# EAGLE board PLACA_AUDIOS_v6_LOBO_GRANDE (EAGLE 7.6.0)
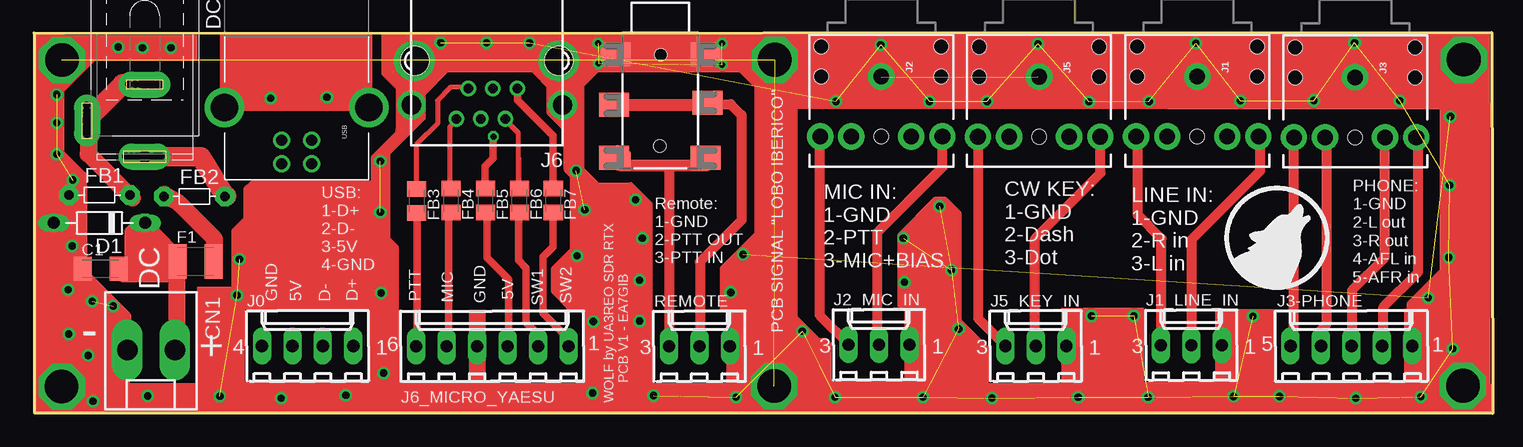
[diagram p0: board, top side]
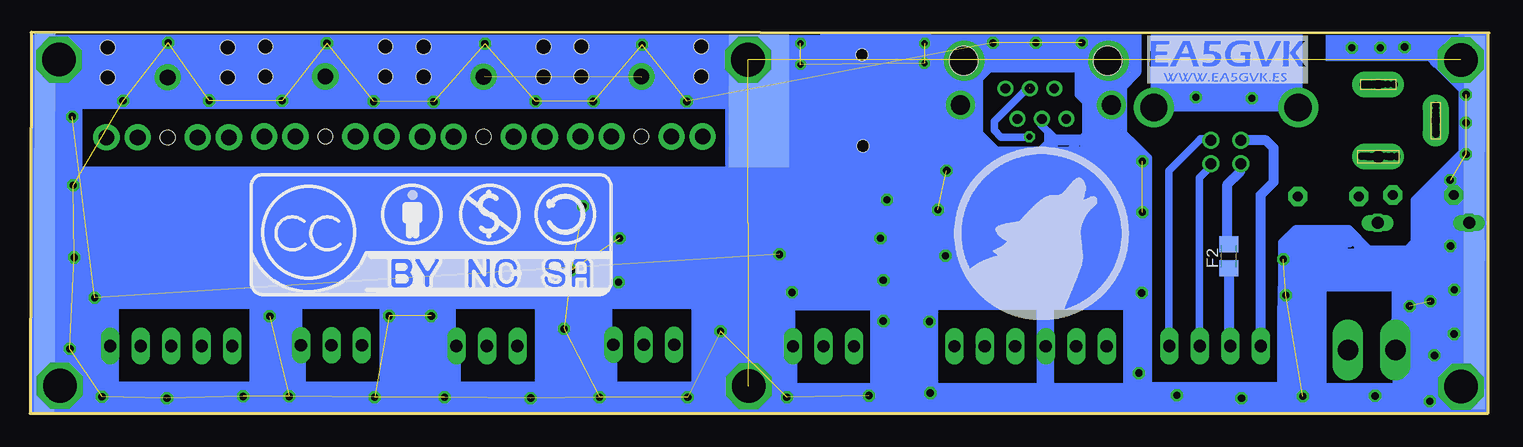
[diagram p1: board, bottom side, seen from below]

Size 121.6 x 31.75 mm. Coordinates in mm from the lower left corner, seen from the top.
Outline: 0,31.69 121.53,31.75 121.6,0 0.06,0.01 0.08,31.62
Copper layers (1*16): Top 0.035mm / dielectric 1.5mm / Bottom 0.035mm
Design rules "default": minimum track width 10mil, minimum drill 24mil, track to track 8mil, track to pad 8mil, pad to pad 8mil, via to via 8mil, smd to smd 8mil, copper to edge 40mil, drill to drill 8mil, minimum pad ring 10mil, minimum via ring 8mil, stop-mask expansion 4mil, vias tented up to drill 0mil, thermal gap 10mil

## Footprints (pad centres in the part's own frame; a part is rotated, then mirrored left to right if it is on the bottom)
C1206K = smd 1.5 x 2: 1 -1.5,0; 2 1.5,0
KK-156-2 = drill 1.7 pad 2.184 long: 1 -1.98,0; 2 1.98,0
D-7.5 = drill 0.813 long: A 3.81,0; C -3.81,0
SPC4078 = drill 0.8 pad 2.184 long: 1 -3,0; 2 0,-4.8 | drill 1 pad 2.184 long: 3 3,0
TP17SQ = smd 1.7 x 1.7: TP 0,0
1503_02 = smd 2.5 x 1.5: 1 -3.75,-10.75; 3 3.75,-10.75 | smd 2.5 x 2: 2 -3.75,-1.9; 2@1 3.95,-5.91; 2@2 3.75,-1.9; 2@3 -3.87,-6.11; 2@4 -3.87,-10.51; 2@5 3.75,-10.51 | hole 1: 0.04,-1.92; -0.04,-9.54
C1210K = smd 1.5 x 2.9: 1 -1.5,0; 2 1.5,0
C0805K = smd 1.3 x 1.6: 1 -1,0; 2 1,0
R-5 = drill 0.813 pad 1.6 octagon: 1 -2.54,0; 2 2.54,0
6410-04 = drill 1.016 long: 1 3.81,0; 2 1.27,0; 3 -1.27,0; 4 -3.81,0
AUDIO-JACK-KIT = drill 1.3 pad 2.184: RING 5,5.1; RSH 5,2.5; SLEEVE 0,0; TIP 5,-5.1; TSH 5,-2.5 | hole 1.2: 0,5; -2.5,5; -2.5,-5; 0,-5; 5,0
6410-03 = drill 1.016 long: 1 2.54,0; 2 0,0; 3 -2.54,0
6410-05 = drill 1.016 long: 1 5.08,0; 2 2.54,0; 3 0,0; 4 -2.54,0; 5 -5.08,0
YH-55-10 = drill 0.8 pad 1.3: 1 -2.54,2.3; 2 -1.54,4.84; 3 -0.5,2.3; 4 0.5,4.84; 5 1.54,2.3; 6 2.54,4.84 | drill 1.6 pad 2.184: S1 -6.3,3.68; S2 6.3,3.68 | hole 2.36: -6,0; 6,0
6410-06 = drill 1.016 long: 1 6.35,0; 2 3.81,0; 3 1.27,0; 4 -1.27,0; 5 -3.81,0; 6 -6.35,0
USB-B-PTH = drill 0.914: D+ 0,1.25; D- 1.981,1.25; GND 0,-1.25; VBUS 1.981,-1.25 | drill 2.286: P$1 -2.718,-6.02; P$2 -2.718,6.02

## Placement (x,y rotation side)
C1  [C1206K]  5.57,12.06 0 top
CN1  [KK-156-2]  9.78,5.27 180 top
D1  [D-7.5]  5.48,15.87 180 top
DC  [SPC4078]  9.23,24.4 270 top
E$1  [TP17SQ]  1.19,30.6 0 bottom
E$2  [TP17SQ]  1.19,29.1 0 bottom
E$3  [1503_02]  52.23,31.82 0 top
E$4  [TP17SQ]  1.2,27.45 0 bottom
E$5  [TP17SQ]  1.2,25.82 0 bottom
E$6  [TP17SQ]  1.22,24.15 0 bottom
E$7  [TP17SQ]  1.22,22.65 0 bottom
E$8  [TP17SQ]  1.23,21 0 bottom
E$9  [TP17SQ]  1.23,19.36 0 bottom
E$10  [TP17SQ]  1.23,17.68 0 bottom
E$11  [TP17SQ]  1.23,16.18 0 bottom
E$12  [TP17SQ]  1.23,14.58 0 bottom
E$13  [TP17SQ]  1.23,12.91 0 bottom
E$14  [TP17SQ]  1.22,13.56 0 bottom
E$15  [TP17SQ]  1.23,11.58 0 bottom
E$16  [TP17SQ]  1.23,10.41 0 bottom
E$17  [TP17SQ]  1.23,8.77 0 bottom
E$18  [TP17SQ]  1.25,7.11 0 bottom
E$19  [TP17SQ]  1.25,5.61 0 bottom
E$20  [TP17SQ]  1.25,3.96 0 bottom
E$21  [TP17SQ]  1.26,2.32 0 bottom
E$22  [TP17SQ]  1.22,1.18 0 bottom
E$23  [CC-NC-BY]  103.19,9.9 0 bottom
E$24  [EA5GVK1]  28.47,27.52 0 bottom
E$26  [TP17SQ]  120.36,30.82 0 bottom
E$27  [TP17SQ]  120.36,29.32 0 bottom
E$28  [TP17SQ]  120.38,27.68 0 bottom
E$29  [TP17SQ]  120.38,26.04 0 bottom
E$30  [TP17SQ]  120.39,24.37 0 bottom
E$31  [TP17SQ]  120.39,22.87 0 bottom
E$32  [TP17SQ]  120.41,21.22 0 bottom
E$33  [TP17SQ]  120.41,19.59 0 bottom
E$34  [TP17SQ]  120.41,17.91 0 bottom
E$35  [TP17SQ]  120.41,16.41 0 bottom
E$36  [TP17SQ]  120.41,14.8 0 bottom
E$37  [TP17SQ]  120.41,13.14 0 bottom
E$38  [TP17SQ]  120.39,13.79 0 bottom
E$39  [TP17SQ]  120.41,11.8 0 bottom
E$40  [TP17SQ]  120.41,10.64 0 bottom
E$41  [TP17SQ]  120.41,9 0 bottom
E$42  [TP17SQ]  120.42,7.33 0 bottom
E$43  [TP17SQ]  120.42,5.83 0 bottom
E$44  [TP17SQ]  120.42,4.18 0 bottom
E$45  [TP17SQ]  120.44,2.55 0 bottom
E$46  [TP17SQ]  120.44,0.87 0 bottom
E$62  [TP17SQ]  59.22,30.69 0 bottom
E$63  [TP17SQ]  60.87,30.69 0 bottom
E$64  [TP17SQ]  62.52,30.69 0 bottom
E$65  [TP17SQ]  59.22,29.19 0 bottom
E$66  [TP17SQ]  60.9,29.19 0 bottom
E$67  [TP17SQ]  62.54,29.19 0 bottom
E$68  [TP17SQ]  59.22,27.93 0 bottom
E$69  [TP17SQ]  60.87,27.93 0 bottom
E$70  [TP17SQ]  62.52,27.93 0 bottom
E$71  [TP17SQ]  59.22,26.43 0 bottom
E$72  [TP17SQ]  60.9,26.43 0 bottom
E$73  [TP17SQ]  62.54,26.43 0 bottom
E$74  [TP17SQ]  59.22,25.61 0 bottom
E$75  [TP17SQ]  60.87,25.61 0 bottom
E$76  [TP17SQ]  62.52,25.61 0 bottom
E$77  [TP17SQ]  59.22,24.11 0 bottom
E$78  [TP17SQ]  60.9,24.11 0 bottom
E$79  [TP17SQ]  62.54,24.11 0 bottom
E$80  [TP17SQ]  59.22,22.84 0 bottom
E$81  [TP17SQ]  60.87,22.84 0 bottom
E$82  [TP17SQ]  62.52,22.84 0 bottom
E$83  [TP17SQ]  59.22,21.34 0 bottom
E$84  [TP17SQ]  60.9,21.34 0 bottom
E$85  [TP17SQ]  62.54,21.34 0 bottom
F1  [C1210K]  13.48,12.66 0 top
F2  [C0805K]  21.69,13.09 90 bottom
FB1  [R-5]  5.48,18.19 0 top
FB2  [R-5]  13.4,18.07 0 top
FB3  [C0805K]  31.92,17.7 270 top
FB4  [C0805K]  34.79,17.73 270 top
FB5  [C0805K]  37.66,17.73 270 top
FB6  [C0805K]  40.49,17.73 270 top
FB7  [C0805K]  43.3,17.73 270 top
J0  [6410-04]  22.83,5.61 0 top
J1  [AUDIO-JACK-KIT]  96.99,28.07 270 top
J1_LINE_IN  [6410-03]  96.5,5.68 0 top
J2  [AUDIO-JACK-KIT]  70.65,28.07 270 top
J2_MIC_IN  [6410-03]  70.46,5.71 0 top
J3  [AUDIO-JACK-KIT]  110.14,28 270 top
J3-PHONE  [6410-05]  109.84,5.61 0 top
J5  [AUDIO-JACK-KIT]  83.81,28.05 270 top
J5_KEY_IN  [6410-03]  83.53,5.61 0 top
J6  [YH-55-10]  37.77,29.39 180 top
J6_MICRO_YAESU  [6410-06]  38.22,5.59 0 top
REMOTE  [6410-03]  55.49,5.59 0 top
USB  [USB-B-PTH]  21.91,22.77 270 top

## Library data of the parts
C1 = ref-packages-longpad
CN1 J0 J1_LINE_IN J2_MIC_IN J3-PHONE J5_KEY_IN J6_MICRO_YAESU REMOTE = con-molex
D1 F1 = ea7gib2
DC = con-jack
E$1 E$2 E$4-E$22 E$26-E$46 E$62-E$85 = testpad
E$3 = con-lumberg
E$23 = cc-by-nc-sa
E$24 = LOGOS_BLAS1
F2 FB3-FB7 = rcl
FB1 FB2 = discrete
J1-J3 J5 = SparkFun-Connectors
J6 = con-wenzhou-yihua
USB = 11111

## Nets
S$20: J0.4

## Tracks (layer width: path | path; a pad name or v marks a point on that pad's centre or on a via)
S$1  (via drill 2.8 pad 3.81)
  other vias: 119.2,29.48
S$2
  Top 1.422: 8.96,21.25 9.03,21.18
S$3
  Top 1.676: 16.05,18.12 15.9,18.18 13.95,21.34 9.32,21.37
S$4  (via drill 2.8 pad 3.81)
  other vias: 2.33,2.22
S$5
  Bottom 1.422: 3.32,16.9 1.38,16.9 1.35,16.87
S$6
  Top 1.422: 4.53,24.57 4.53,21.63 8.22,17.94
  Top 1.676: 9.57,27.43 7.4,27.43 4.53,24.57
S$7
  Top 1.422: 8.3,15.04 9.81,15.04 11.93,12.93 11.93,5.36
S$8
  Top 1.422: 15.06,12.4 15.06,14.55 12.12,17.49 10.98,18.12 10.89,18.24
S$9
  Top 1.422: 3.15,16.87 3.15,11.29 7.48,6.96 7.5,6.96
S$10
  Top 1.422: 8.25,15.09 8.25,12.37 7.5,11.62 11.28,11.62 11.33,11.67 11.33,12.19 9.62,13.9 9.62,12.68 9.44,12.5 9.44,13.89 9.21,14.11 9.21,12.52 9.63,12.11 10.14,12.11 10.17,12.14
S$11
  Bottom 0.61: 0.96,21.97 2.01,21.97 6.21,17.77 6.21,14.31 6.83,13.69 10.01,13.69 11.7,15.39 16.11,15.39 17.25,14.25 17.25,9.39 16.86,9 16.86,9.97 16.35,10.48 4.65,10.48 3.87,11.26 3.87,18.19 4.56,18.89 4.56,18.64 5.75,17.46 5.75,11.39 5.78,11.36
S$12
  Top 0.406: 36.38,27.16 34.73,27.16 33.65,26.08 33.65,24.12 31.89,22.36 31.89,19.07
S$13
  Top 0.406: 31.91,18.99 31.77,18.86
S$14
  Top 0.61: 31.94,16.57 31.94,5.04
S$15
  Top 0.61: 43.27,18.73 43.27,23.14 40.32,26.1 40.32,27.03 40.35,27.06
S$16
  Top 0.406: 40.41,18.97 40.41,23.36 39.26,24.51
S$17
  Bottom 0.813: 21.63,5.64 21.63,11.89
S$18
  Bottom 0.61: 24.13,5.88 24.13,19.65 23.18,20.61
S$19
  Top 0.406: 40.41,21.3 40.41,19.02
S$20
  Bottom 0.813: J0.4 19.02,18.21 17.94,19.29 17.94,22.11 18.59,22.75 20.7,22.75 20.74,22.71
S$21
  Bottom 1.016: 110.32,27.82 108.34,25.84 64.11,25.84 62.88,27.07
S$22
  Bottom 1.016: 97.05,28.11 97.05,26.11
S$23  (1 unrouted)
  Bottom 1.016: 83.72,28.04 83.72,26.25 83.78,26.19 | 70.65,27.99 70.65,26.21
S$24
  Bottom 1.016: 47.7,29.82 48.91,29.82 50.96,27.78 53.84,27.78 55.82,29.76 55.82,29.77 55.94,29.89
S$25  (via drill 2.8 pad 3.81)  (2 unrouted)
  other vias: 2.34,29.45 61.77,29.46 61.71,2.27
S$26
  Bottom 0.61: 26.67,5.32 26.67,20.23 24.03,22.87
S$27
  Top 1.422: 7.86,5.93 5.73,5.93 2.36,2.55
S$28
  Top 0.406: 37.38,19.26 37.41,19.23
S$29  (via drill 0.5 pad 0.25)  (3 unrouted)
  other vias: 57.38,30.84 47.04,30.84 47.07,29.18 57.38,29.07
S$30
  Top 0.406: 36.42,27.14 35.85,27.14
S$31
  Top 1.016: 7.55,0.72 7.55,8.18 3.89,11.83 3.89,19.8 1.8,21.89 1.8,21.07 3.51,19.36 3.51,17.62 3.05,17.16 3.05,18.89 2.82,19.11 2.82,17.94 2.43,17.55 2.43,18.19 2.55,18.32 2.55,15.6
S$32
  Top 0.61: 43.29,16.87 43.29,13.9 42.45,13.07 42.45,8.32 44.32,6.45
S$33
  Top 0.406: 34.73,18.81 34.73,23.94 35.35,24.57
S$34
  Top 0.61: 34.73,16.66 34.57,16.66 34.57,5.49
S$35
  Top 0.61: 37.7,16.44 37.74,16.48
S$36
  Top 0.61: 40.43,16.32 40.47,16.36
S$37  (1 unrouted)
  Top 1.422: 6.24,30.52 5.27,30.52 1.62,26.88 1.62,28.11 2.97,29.46
  Bottom 1.422: 2.97,29.46 4.23,29.46 5.03,30.25 4.98,30.25 1.73,27
S$38
  Bottom 1.016: 70.57,28.04 70.77,28.04
S$39
  Top 0.61: 40.4,16.86 40.4,12.76 41.05,12.11 41.05,7.56 41.94,6.68
S$40
  Top 0.61: 39.57,5.4 39.57,11.18 37.79,12.96 37.79,16.39 37.74,16.44 37.79,16.44
S$41  (via drill 2.8 pad 3.81)
  other vias: 119.13,2.3
S$42
  Top 0.61: 44.46,11.1 44.67,10.89
S$43
  Top 0.61: 46.05,9.46 44.79,9.46 43.83,10.43 43.83,11.88 44.27,12.32 44.77,12.32 44.82,12.27 44.82,12.66 45.05,12.89 | 44.54,11.25 45.05,11.76 45.05,12.89 | 45.05,12.96 45.05,12.89 | 45.05,12.96 44.84,12.75 44.84,10.12 43.8,11.16 | 45.05,12.96 45.05,13.74 44.99,13.8 44.99,20.32 44.96,20.36
S$44
  Bottom 1.016: 56.88,29.86 60.07,29.86 64.06,25.87
S$45
  Top 0.813: 105.01,23 105.01,6.91 104.61,6.51
S$46
  Bottom 1.016: 1.1,24.15 1.1,22.59 3.95,19.74 2.79,19.74 2.49,20.04 2.49,13.25 7.62,8.11
S$47
  Bottom 1.016: 3.29,11.39 3.29,11.29 7.46,7.12
S$48
  Bottom 0.813: 7.59,5.1 7.59,5.4 7.64,5.44 7.64,0.55 6.29,0.55 6.29,1 6.98,1 6.98,7.12 7.5,7.12 7.5,5.7 7.58,5.7 7.58,6.4 7.68,6.4 | 7.68,6.4 7.68,4.84 | 7.68,6.4 7.68,6.51 7.74,6.51 7.74,5.1 7.71,5.1 7.71,7.86 7.66,7.86
  Bottom 1.016: 4.98,8.41 4.98,7.71 7.59,5.1
S$49
  Top 0.813: 56.82,25.72 56.7,25.61
S$50
  Top 0.61: 49.01,25.59 56.41,25.59 56.52,25.48
S$51
  Top 0.61: 48.41,21.51 48.6,21.51 49.63,20.47 55.91,20.47 55.94,20.5
S$52  (via drill 2.35)
  other vias: 31.71,29.39
S$53  (via drill 2.35)
  other vias: 43.76,29.39
S$54
  Top 0.61: 120.36,9.01 114.73,9.01 114.73,9.11 117.85,12.22 117.85,11.76 115.44,9.34 117.24,9.34 117.41,9.51 117.41,10.65 117.36,10.69 117.36,10.44 116.61,9.69 116.44,9.69 116.35,9.6 117.34,9.6 117.39,9.55
S$55
  Top 0.813: 52.98,5.44 52.98,15.27 52.98,17.44 52.98,20.23 52.96,20.25
S$56
  Top 0.813: 65.5,23.04 65.5,8.19 68.03,5.67
S$57
  Top 0.813: 70.35,5.67 70.35,15.11 75.77,20.52 75.77,23.13 75.87,23.23
S$58
  Bottom 0.813: 73.11,5.71 73.11,1.62 72.78,1.29
S$59
  Bottom 0.813: 86.13,5.71 86.13,1.8 85.84,1.51
S$60
  Bottom 0.813: 99.06,5.76 99.06,1.32 98.92,1.18
S$61
  Bottom 0.813: 115.12,5.57 115.12,1.44 115.23,1.33
S$62
  Top 0.813: 78.71,23 78.71,7.93 81.19,5.44
S$63
  Top 0.813: 83.46,5.64 83.46,14.55 88.92,20.01 88.92,23.11 88.84,23.19
S$64
  Top 0.813: 94,5.5 94,14.57 92.03,16.54 92.03,22.92 92,22.95
S$65
  Top 0.813: 96.53,5.57 96.53,14.49 102.24,20.21 102.24,23.11 102.12,23.23
S$66
  Top 0.813: 107.75,23.02 107.75,7.39 107.14,6.79
S$67
  Top 0.813: 112.57,22.83 112.57,12.94 109.88,10.25 109.88,5.93
S$68
  Top 0.813: 112.5,5.32 112.5,8.86 115.39,11.76 115.39,22.9 115.35,22.95
S$69
  Bottom 0.813: 58.1,5.57 58.1,1.42
S$70
  Top 0.813: 48.72,25.77 58.1,25.77 59.01,24.86 59.01,16.11 55.53,12.63 55.53,5.67 55.68,5.52
S$71
  Top 0.61: 89.66,2.14 92.1,2.14 92.26,2.31 102.69,2.31 102.94,2.05
S$72
  Top 0.61: 77.49,2.68 79.28,2.68 79.29,2.67 79.29,5.41 77.03,7.68 77.03,5.01 77.3,4.74 78.68,4.74 78.87,4.93 78.87,5.28 77.22,6.93 77.22,5.54 77.46,5.29 78.27,5.29 78.41,5.16 78.12,5.16 77.69,5.59 77.69,5.96 77.58,6.06
S$73
  Top 0.61: 76.8,5.71 76.8,5.16 77.5,4.46 77.21,4.46 77.03,4.27 77.03,16.62 75.9,17.75 75.19,17.75 72.27,14.82 72.27,9.07 74.59,9.07 74.62,9.04 74.62,1.96 75.05,1.54 75.05,1.92 74.58,2.39 64.05,2.39 63.63,2.8
S$74
  Top 0.61: 72.66,14.25 72.66,14.43 75.36,17.13 76.05,17.13 76.14,17.04 76.14,16.74 76.69,16.18 76.69,14.77 76.72,14.75 73.52,14.75 73.5,14.73 73.63,14.73 75.51,16.61 76.03,16.61 76.14,16.5 76.14,15.57 76.49,15.22 74.82,15.22 74.75,15.3 74.75,15.43 75.5,16.18 74.94,16.18 73.92,15.16 75.13,15.16 75.88,15.91 75.66,15.91 75.56,16.02 75.88,16.02 75.94,16.08
S$75
  Top 0.61: 63.95,2.08 63.95,3.39 66.21,5.65 65.69,5.65 62.93,8.41 62.93,7.8 64.31,6.42 63.88,6.42 63.69,6.22 63.69,6.5 63.65,6.54 63.65,6.34 63.84,6.15 63.99,6.15 64.09,6.04 64.69,6.04 64.75,5.98 64.86,5.98 64.88,5.97 65.97,5.97 66.22,5.71 66.22,2.19 66.05,2.01
S$76
  Top 0.61: 62.01,18.39 62.01,16.56 57.51,12.06 58.34,12.06 60.27,14 60.27,13.51 58.98,12.22 60.36,12.22 60.6,12.46
S$77
  Bottom 0.61: 44.61,30.22 44.61,21.39 44.37,21.15 44.37,21.72 44.34,21.75 44.34,30.01 44.67,30.34
S$78
  Top 1.422: 4.53,24.5 4.53,23.05
S$79
  Top 0.61: 22.57,17.41 26.51,17.41 30.1,13.82 30.1,6.84 30,6.73 30,8.26 29.61,8.65 29.61,13.39 29.8,13.59 29.8,13.62
S$80
  Bottom 0.61: 45.03,30.11 45.03,21.46 45.15,21.34
S$81
  Top 0.61: 45.44,14.43 45.44,12.97 44.74,12.29 44.74,12.55 45.57,13.38
S$82
  Bottom 0.61: 45.21,17.75 45.21,13.79 43.41,11.98 43.41,10.15 44.63,8.94 47.46,8.94 47.51,8.98 45.2,8.98 44.05,10.12 44.05,11.93 43.94,12.04 44.12,12.04 44.97,12.9 44.97,10.64 44.41,10.08 44.41,10.27 43.86,10.83 43.86,11.47 43.79,11.55 43.79,10.47 43.76,10.44 44.48,10.44 45.06,9.86 45.06,9.78 45.09,9.75 45.09,9.94 44.38,10.65 44.38,11.62 44.41,11.65 44.41,11.88 44.52,11.98 44.54,11.98 44.61,12.06 44.61,12.04 44.82,11.83 44.82,11.47 44.94,11.36 44.94,11.13 45.05,11.02
S$83  (via drill 0.6)  (1 unrouted)
  other vias: 28.89,16.75 28.89,21.01
S$84  (via drill 0.6)
  other vias: 50.18,17.79
S$85  (via drill 0.6)
  other vias: 28.95,10.04
S$86  (via drill 0.6)
  other vias: 29.18,3.36
S$87  (via drill 0.6)  (2 unrouted)
  other vias: 15.51,1.42 16.94,9.84 17.15,12.86
S$88  (via drill 0.6)
  other vias: 20.63,1.26
S$89  (via drill 0.6)
  other vias: 26.01,1.5
S$90  (via drill 0.6)  (1 unrouted)
  other vias: 45.93,16.98 45.21,20.23
S$91  (via drill 0.6)
  other vias: 45.3,13.12
S$92  (via drill 0.6)
  other vias: 50.49,11.1
S$93  (via drill 0.6)
  other vias: 46.65,7.65
S$94  (via drill 0.6)
  other vias: 50.49,7.69
S$95  (via drill 0.6)
  other vias: 46.57,1.69
S$96  (via drill 0.6)  (36 unrouted)
  other vias: 51.68,1.48 58.53,1.33 66.8,1.33 74.13,1.33 79.88,1.27 87.06,1.33 92.89,1.33 100.02,1.41 103.84,1.41 115.62,1.39 110.2,1.26 117.94,12.99 118.02,19.02 118.29,5.39 64.06,6.86 75.51,17.25 72.48,14.59 76.5,11.94 77.1,7.04 88.17,8.11 91.69,8.11 101.62,8.08 66.87,26 74.66,26 79.47,26 87.96,25.96 92.97,26 100.59,26.04 106.69,26.07 113.87,26.04 70.6,30.72 83.7,30.81 96.87,30.86 110.1,30.89 37.76,30.89 33.93,30.89 41.34,30.87 72.57,10.92
S$97  (via drill 0.6)  (2 unrouted)
  other vias: 59.13,13.25 116.23,9.63 118.09,24.73
S$98  (via drill 0.6)
  other vias: 58.1,10.08
S$99  (via drill 0.6)
  other vias: 19.76,26.26
S$100  (via drill 0.6)
  other vias: 24.44,26.36
S$101  (via drill 0.6)
  other vias: 11.43,30.48
S$102  (via drill 0.6)
  other vias: 9.06,30.48
S$103  (via drill 0.6)
  other vias: 7.04,30.52
S$104  (via drill 0.6)  (3 unrouted)
  other vias: 3.24,19.44 1.92,26.57 1.92,24.22 1.92,21.58
S$105  (via drill 0.6)
  other vias: 3.21,13.95 2.88,10.29
S$106  (via drill 0.6)  (1 unrouted)
  other vias: 4.88,9.34 6.62,8.94
S$107  (via drill 0.6)
  other vias: 4.55,4.83
S$108  (via drill 0.6)
  other vias: 9.5,1.45
S$109  (via drill 0.6)
  other vias: 4.94,1.02
S$110  (via drill 0.6)
  other vias: 2.91,6.61
S$111
  Top 0.61: 48.68,20.93 48.68,22.05
S$112
  Top 1.422: 44.85,27.54 44.85,20.5 48.41,16.95
S$113
  Top 0.406: 47.02,15.55 45.13,15.55 45.06,15.63
S$114
  Top 0.406: 46.47,15.5 45.48,15.5 45.12,15.86 45.12,20.37 45.13,20.39 45.13,20.29 45.49,19.93 45.49,17 45.74,16.75 45.74,18.84 45.78,18.89 45.78,17.59 46.07,17.31 46.07,18.42 46.2,18.55 46.2,17.41 46.37,17.25 46.37,17.89 46.6,18.14 46.6,17.36 46.74,17.22 46.74,17.61 46.86,17.73
S$115
  Top 0.406: 45.99,19.07 49.76,19.07 51.38,17.44 51.38,1.96 51.13,1.72
S$116
  Top 0.406: 47.35,18.78 49.74,18.78 50.91,17.61 48.71,17.61 47.87,18.45 49.86,18.45 50.64,17.67 48.51,17.67 48.21,17.97 50.01,17.97 50.02,17.98 48.59,17.98 48.41,18.16 49.6,18.16
S$117
  Bottom 0.61: 10.65,13.68 10.65,13.69 11.7,14.75 11.7,14.19 11.64,14.13 15.45,14.13 16.07,14.75 16.26,14.75 17.13,13.87 16.23,13.87 16.17,13.82 16.17,14.11 16.16,14.13 16.52,14.13 16.61,14.04 16.61,13.36 16.55,13.3 16.55,13.09 16.41,12.96
S$118  (via drill 0.6)
  other vias: 50.73,14.59
S$119  (via drill 0.6)
  other vias: 7.91,27.43
S$120  (via drill 0.6)
  other vias: 8.45,27.42
S$121  (via drill 0.6)
  other vias: 8.87,27.42
S$122  (via drill 0.6)
  other vias: 9.14,27.42
S$123  (via drill 0.6)
  other vias: 9.47,27.42
S$124  (via drill 0.6)
  other vias: 9.69,27.4
S$125  (via drill 0.6)
  other vias: 9.93,27.4
S$126  (via drill 0.6)
  other vias: 10.05,27.4
S$127  (via drill 0.6)
  other vias: 10.29,27.4
S$128  (via drill 0.6)
  other vias: 10.48,27.4
S$129  (via drill 0.6)
  other vias: 4.43,25.66
S$130  (via drill 0.6)
  other vias: 4.44,25.21
S$131  (via drill 0.6)
  other vias: 4.43,24.89
S$132  (via drill 0.6)
  other vias: 4.44,24.64
S$133  (via drill 0.6)
  other vias: 4.44,24.43
S$134  (via drill 0.6)
  other vias: 4.43,24.21
S$135  (via drill 0.6)
  other vias: 4.44,23.97
S$136  (via drill 0.6)
  other vias: 4.44,23.8
S$137  (via drill 0.6)
  other vias: 4.44,23.62
S$138  (via drill 0.6)
  other vias: 4.41,23.41
S$139  (via drill 0.6)
  other vias: 4.44,23.26
S$140  (via drill 0.6)
  other vias: 7.68,21.4
S$141  (via drill 0.6)
  other vias: 8.12,21.4
S$142  (via drill 0.6)
  other vias: 8.33,21.39
S$143  (via drill 0.6)
  other vias: 8.6,21.42
S$144  (via drill 0.6)
  other vias: 8.94,21.42
S$145  (via drill 0.6)
  other vias: 9.27,21.4
S$146  (via drill 0.6)
  other vias: 9.54,21.4
S$147  (via drill 0.6)
  other vias: 9.81,21.39
S$148  (via drill 0.6)
  other vias: 10.08,21.4
S$149  (via drill 0.6)
  other vias: 10.3,21.42
S$150  (via drill 0.6)
  other vias: 10.56,21.42
S$151  (via drill 0.6)
  other vias: 10.62,21.43
S$152
  Top 1.016: 48.81,20.68 56.15,20.68
S$153
  Top 1.016: 48.66,25.71 56.35,25.71 56.37,25.69
S$154  (1 unrouted)
S$155
  Bottom 0.61: 33.27,27.61 32.85,27.61 32.85,26.82
S$156
  Top 0.61: 32.21,25.15 32.21,26.52 34.68,29 34.08,29 32.63,27.54 32.63,28.3 32.99,28.66 33.05,28.66 33.1,28.72
S$157  (1 unrouted)
  Top 0.61: 39.27,29.49 40.88,29.49 44.13,26.23 44.13,27.16 43.82,27.48 43.49,27.48 42.36,28.61 42.9,28.61 43.26,28.25
  Bottom 0.61: 43.26,28.25 43.26,27.09 | 43.26,27.09 43.77,26.58 | 43.26,27.09 41.55,28.8 41.55,28.9 41.93,29.28 42.26,29.28 44.19,27.34 44.19,27.69 43.04,28.84 43.14,28.84 43.2,28.79
S$158
  Bottom 0.61: 30.38,14.14 28.57,14.14 28.4,14.32 28.4,21.3 31.5,24.4 31.5,29.73 31.6,29.83 32.3,29.83 32.38,29.75 33.99,29.75 34.21,29.97 34.21,26.54 32.32,24.64 32.32,22.87 34.04,21.16 33.78,21.16 32.34,22.61 30.18,22.61 29.13,21.55 29.13,18.55 28.83,18.25 28.83,20.94 28.74,21.03 28.74,18.42 29.25,17.91 29.25,21.4 30.2,22.35 31.94,22.35 31.98,22.3 | 31.98,22.3 32.02,22.26 31.08,22.26 30.48,22.86 31.04,22.86 31.52,23.34 31.52,23.89 31.74,24.12 31.6,24.12 30.9,23.41 31.47,23.41 31.63,23.25 31.63,23.21 31.82,23.02 31.82,23.28 32.04,23.5 32.04,23.75 31.98,23.8 31.98,24.01 31.94,24.06 31.94,29.37 32.22,29.65 32.22,29.23 32.57,28.89 32.57,25.74 32.02,25.2 32.19,25.2 33.87,26.88 33.87,27.99 34.07,28.18 32.46,28.18 32.34,28.3 32.34,26.47 32.37,26.44 32.85,26.44 33.59,27.18 33.59,27.48 33.2,27.87 33.2,27.72 33.15,27.68 33.15,27.25 33.12,27.22 33.03,27.22 33.03,28 32.46,28.57 32.46,28.93 32.38,28.93 31.07,30.25 31.07,21.43 31.2,21.3 31.2,28.59 32.04,29.43 | 31.98,22.3 33.71,22.3 33.82,22.43
S$159
  Top 0.61: 28.68,18.57 28.77,18.57 29.41,19.21 29.41,21.72 32.35,24.66 32.35,26.75 32.6,26.98 31.04,26.98 30.99,26.94 30.99,23.89 28.41,21.32 28.94,21.32 28.94,21.63 31.68,24.37 31.68,27.22 31.86,27.4
S$160
  Top 1.676: 4.4,24.6 4.4,23.19
S$161
  Top 1.676: 8.93,21.29 8.98,21.34
S$162
  Top 0.61: 7.82,5.31 7.85,5.28 7.85,8.1 7.3,8.64
S$163
  Top 0.61: 3.93,15.06 4.11,15.06
S$164
  Top 0.61: 1.29,19.25 2.33,19.25 2.69,19.61 3.81,19.61 4.08,19.87 4.14,19.82 4.14,15.24 3.39,14.49
S$165
  Top 1.016: 43.21,29.23 43.21,25.17 44.84,23.55
S$166
  Top 1.016: 45.38,29.41 45.38,20.14 45.42,20.1
S$167
  Top 1.016: 44.84,26.86 47.27,29.29 58.62,29.29 60.8,27.12
S$168  (2 unrouted)
  Top 0.61: 29.94,28.43 29.6,28.43 29.3,28.72 29.3,28.35 30.75,26.89 30.75,27.51 30.13,28.12
  Top 1.016: 30.68,29.43 30.68,23.64 30.66,23.62
  Bottom 0.61: 30.74,29.47 29.79,29.47 29.3,28.98 29.3,28.36 30.66,27 30.66,27.71 29.94,28.43
  Bottom 1.016: 30.66,23.62 30.66,27 30.66,29.4 30.74,29.47
S$169
  Bottom 0.61: 24.06,22.9 23.24,22.9
S$170
  Bottom 0.813: 21.8,14.18 21.8,19.09 20.74,20.14
S$171
  Top 0.61: 16.8,10.29 16.8,15.18 19.3,17.68 19.3,17.1 17.55,15.34 18.03,15.34 18.39,15.71
S$172
  Top 0.61: 28.89,19.11 18.24,19.11 17.79,18.66 17.79,14.94 17.7,14.85 17.79,14.85 18.18,15.24 18.18,18.36 18.55,18.73 18.55,15.24 18.38,15.06
S$173
  Bottom 0.61: 31.7,26.58 31.7,25.08 34.04,22.74
S$174
  Bottom 0.61: 42.52,22.43 43.11,23.01
S$175
  Bottom 0.61: 43.11,24 43.11,23.07 43.02,22.98 43.02,22.41 42.91,22.3
S$176  (via drill 1)
  other vias: 9.29,15.89
S$177  (via drill 0.5)
  other vias: 38.31,23.05
S$178
  Bottom 0.61: 38.25,23.02 40.66,23.02 41.22,23.58 41.22,24.34 38.57,27
S$179
  Bottom 0.61: 37.34,24.71 37.34,24.06 36.29,23.01 36.29,21.84 36.21,21.76
S$180
  Bottom 0.61: 33.6,27.3 33.6,23.26 34.95,21.91 33.84,21.91 33.13,22.62 36.69,22.62 38.31,21 40.16,21 42.66,23.5 42.66,23 41.85,22.18
S$181
  Bottom 0.61: 44.97,13.15 44.97,17.23 43.95,18.25 45.68,18.25 46.59,17.34 46.66,17.34 46.99,17.67 41.79,17.67 41.22,17.1 41.22,13.61 39.96,12.34 39.96,12.75 40.76,13.54 40.76,17.57 40.99,17.8 40.99,17.46 41.02,17.43 41.04,17.43 41.48,17.86 41.09,17.86 40.94,17.71
S$182
  Top 0.61: 38.28,23.05 38.28,21.25 37.6,20.58 37.6,18.58
S$183
  Bottom 0.61: 36.42,22.9 36.42,21.93 36.3,21.81
S$184
  Bottom 0.61: 36.75,23.4 36.75,21.03 36.66,20.94
S$185
  Bottom 0.61: 33.91,22.92 36.12,22.92 36.39,22.65
S$186
  Top 0.61: 49.38,16.3 45.8,16.3
S$187
  Top 0.61: 44.64,8.94 48.03,8.94 48.21,8.76 47.82,8.76 | 47.82,8.76 46.89,9.69 45.03,9.69 44.77,9.43 44.77,9.45 | 47.82,8.76 44.85,8.76 43.41,10.2 43.41,12.01 45.8,14.4
S$188
  Top 0.61: 45.03,14.83 45.03,14.29
S$189  (via drill 1)
  other vias: 1.65,15.87
S$190
  Top 0.61: 9.41,14.62 8.94,14.62 8.94,16.07 9.64,16.07 9.64,16 9.61,16 9.61,15.02 9.54,15.02 9.54,15.63 9.32,15.63 9.32,15.86
S$191
  Top 0.61: 44.52,11.79 44.16,11.43
(copper drawn outside any net)
  shapes: Bottom area x45, Top area x49

## Text on the board
tPlace: DC | Remote: / 1-GND / 2-PTT OUT / 3-PTT IN | CW KEY: / 1-GND / 2-Dash / 3-Dot | USB: / 1-D+ / 2-D- / 3-5V / 4-GND | MIC IN: / 1-GND / 2-PTT / 3-MIC+BIAS | LINE IN: / 1-GND / 2-R in / 3-L in | PHONE: / 1-GND / 2-L out / 3-R out / 4-AFL in / 5-AFR in | 5V | - | GND | 5V | D- | D+ | PTT | MIC | GND | SW1 | SW2 | PCB SIGNAL "LOBO IBERICO" | + | WOLF by UA3REO SDR RTX / PCB V1 - EA7GIB | C:/Users/User/Desktop/lobo.bmp | C:/Users/User/Desktop/lobo.bmp | C:/Users/User/Desktop/lobo.bmp | C:/Users/User/Desktop/lobo.bmp